# EAGLE board hometech++ (EAGLE 5.11)
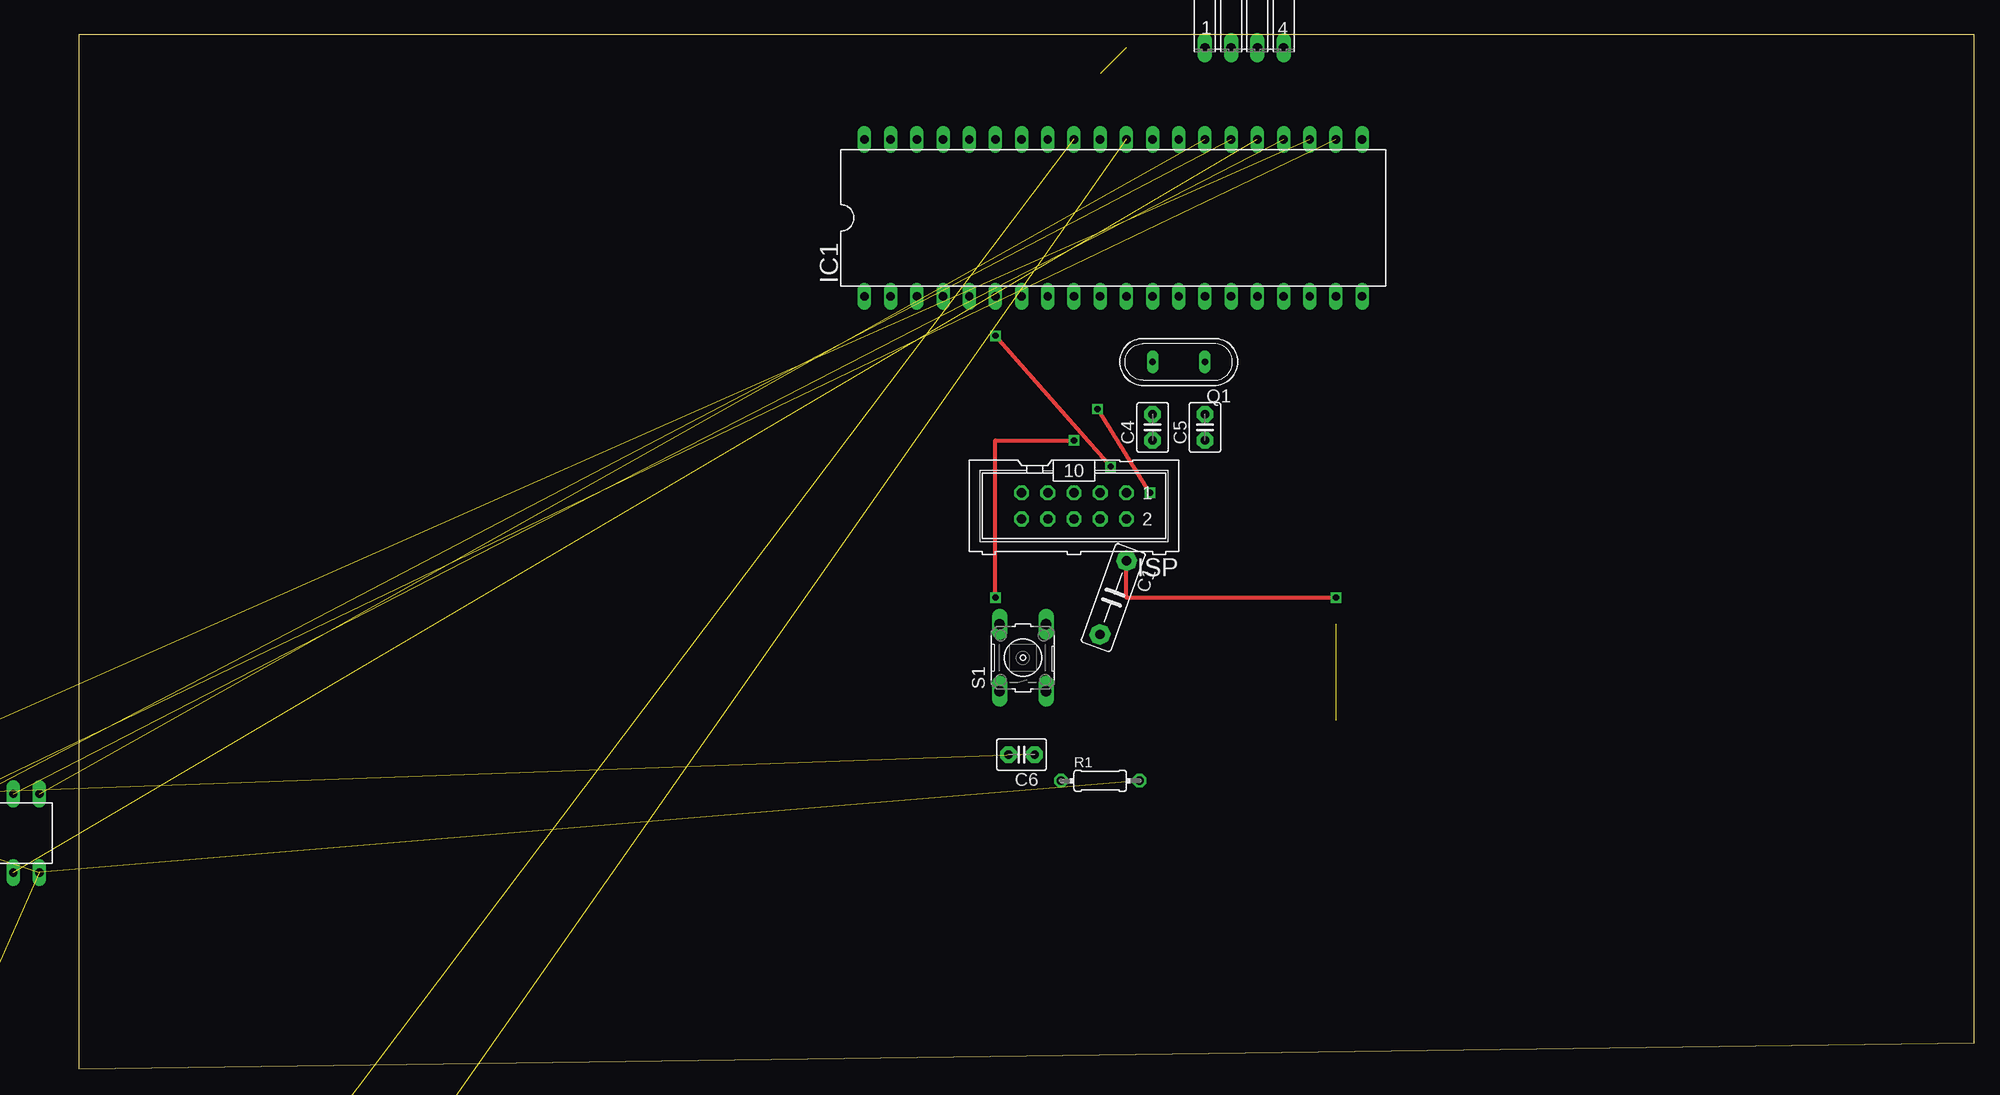
[diagram p0: board, top side]
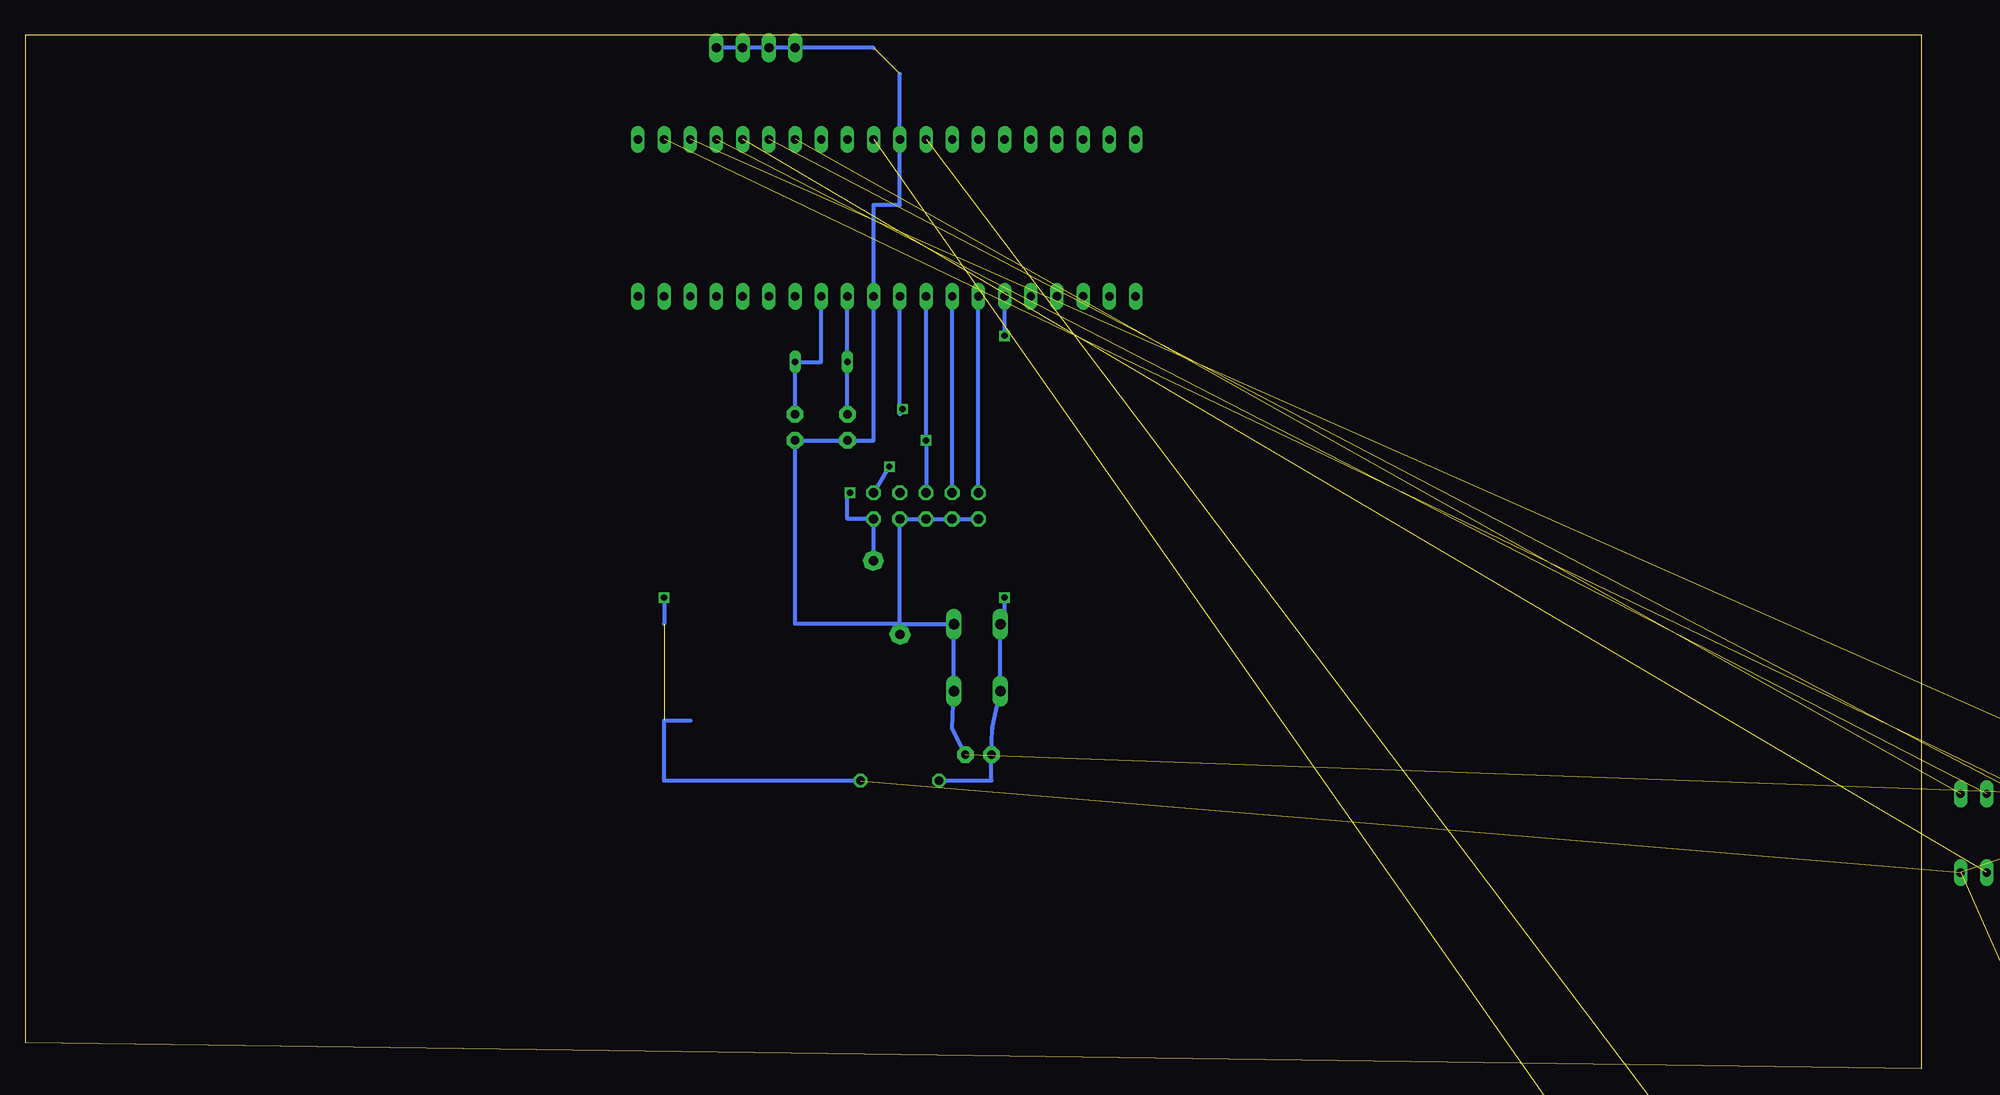
[diagram p1: board, bottom side, seen from below]

Size 183.82 x 100.32 mm. Coordinates in mm from the lower left corner, seen from the top.
Outline: 0,0 183.82,2.54 183.82,100.32 0,100.32 0,0
Copper layers (1*16): Top 0.035mm / dielectric 1.5mm / Bottom 0.035mm
Design rules "default *": minimum track width 10mil, minimum drill 1mil, track to track 8mil, track to pad 8mil, pad to pad 8mil, via to via 8mil, smd to smd 8mil, copper to edge 8mil, drill to drill 8mil, minimum pad ring 10mil, minimum via ring 8mil, stop-mask expansion 0mil, vias tented up to drill 0mil, thermal gap 10mil

## Footprints (pad centres in the part's own frame; a part is rotated, then mirrored left to right if it is on the bottom)
C7.5B3 = drill 0.914 pad 1.905 octagon: 1 -3.81,0; 2 3.81,0
C2.5-3 = drill 0.813 pad 1.6 octagon: 1 -1.27,0; 2 1.27,0
DO41-10 = drill 1.118 round: A 5.08,0; C -5.08,0
DIL40 = drill 0.813 long: 1 -24.13,-7.62; 2 -21.59,-7.62; 3 -19.05,-7.62; 4 -16.51,-7.62; 5 -13.97,-7.62; 6 -11.43,-7.62; 7 -8.89,-7.62; 8 -6.35,-7.62; 9 -3.81,-7.62; 10 -1.27,-7.62; 11 1.27,-7.62; 12 3.81,-7.62; 13 6.35,-7.62; 14 8.89,-7.62; 15 11.43,-7.62; 16 13.97,-7.62; 17 16.51,-7.62; 18 19.05,-7.62; 19 21.59,-7.62; 20 24.13,-7.62; 21 24.13,7.62; 22 21.59,7.62; 23 19.05,7.62; 24 16.51,7.62; 25 13.97,7.62; 26 11.43,7.62; 27 8.89,7.62; 28 6.35,7.62; 29 3.81,7.62; 30 1.27,7.62; 31 -1.27,7.62; 32 -3.81,7.62; 33 -6.35,7.62; 34 -8.89,7.62; 35 -11.43,7.62; 36 -13.97,7.62; 37 -16.51,7.62; 38 -19.05,7.62; 39 -21.59,7.62; 40 -24.13,7.62
DIL20 = drill 0.813 long: 1 -11.43,-3.81; 2 -8.89,-3.81; 3 -6.35,-3.81; 4 -3.81,-3.81; 5 -1.27,-3.81; 6 1.27,-3.81; 7 3.81,-3.81; 8 6.35,-3.81; 9 8.89,-3.81; 10 11.43,-3.81; 11 11.43,3.81; 12 8.89,3.81; 13 6.35,3.81; 14 3.81,3.81; 15 1.27,3.81; 16 -1.27,3.81; 17 -3.81,3.81; 18 -6.35,3.81; 19 -8.89,3.81; 20 -11.43,3.81
ML10 = drill 0.914 octagon: 1 -5.08,-1.27; 2 -5.08,1.27; 3 -2.54,-1.27; 4 -2.54,1.27; 5 0,-1.27; 6 0,1.27; 7 2.54,-1.27; 8 2.54,1.27; 9 5.08,-1.27; 10 5.08,1.27
QS = drill 0.61 long: 1 -2.54,0; 2 2.54,0
0204/7 = drill 0.813 octagon: 1 -3.81,0; 2 3.81,0
AC01 = drill 1.1 pad 2 round: 1 -8.9,0; 2 8.9,0
0204V = drill 0.813 octagon: 1 -1.27,0; 2 1.27,0
B3F-10XX = drill 1.016 long: 1 -3.251,2.261; 2 3.251,2.261; 3 -3.251,-2.261; 4 3.251,-2.261
04PA = drill 0.914 long: 1 -3.81,0; 2 -1.27,0; 3 1.27,0; 4 3.81,0

## Placement (x,y rotation side)
C1  10u  [C7.5B3]  100.33,45.72 250.1 top
C2  [C2.5-3]  -35.56,-93.98 0 top  (outside the outline)
C3  [C2.5-3]  -43.18,-96.52 0 top  (outside the outline)
C4  27pf  [C2.5-3]  104.14,62.23 90 top
C5  27pf  [C2.5-3]  109.22,62.23 90 top
C6  100nf  [C2.5-3]  91.44,30.48 180 top
D1  1N4004  [DO41-10]  -22.86,-35.56 0 top  (outside the outline)
D2  1N4004  [DO41-10]  -22.86,-43.18 0 top  (outside the outline)
D3  1N4004  [DO41-10]  -22.86,-50.8 0 top  (outside the outline)
D4  1N4004  [DO41-10]  -22.86,-58.42 0 top  (outside the outline)
D5  1N4004  [DO41-10]  -22.86,-66.04 0 top  (outside the outline)
D6  1N4004  [DO41-10]  -22.86,-73.66 0 top  (outside the outline)
D7  1N4004  [DO41-10]  -22.86,-81.28 0 top  (outside the outline)
D8  1N4004  [DO41-10]  -22.86,-88.9 0 top  (outside the outline)
IC1  ATMEGA644-20PU  [DIL40]  100.33,82.55 0 top
IC2  L293E  [DIL20]  -15.24,22.86 0 top  (outside the outline)
ISP  [ML10]  96.52,54.61 180 top
Q1  16MHz  [QS]  106.68,68.58 180 top
R1  10K  [0204/7]  99.06,27.94 0 top
R2  [AC01]  -20.32,-5.08 0 top  (outside the outline)
R3  [AC01]  -20.32,-12.7 0 top  (outside the outline)
R4  [AC01]  -20.32,-20.32 0 top  (outside the outline)
R5  [AC01]  -20.32,-27.94 0 top  (outside the outline)
R6  [0204V]  -27.94,-96.52 0 top  (outside the outline)
S1  [B3F-10XX]  91.57,39.88 90 top
SL1  [04PA]  113.03,99.06 0 top

## Library data of the parts
C1-C6 = capacitor-wima
D1-D8 = diode
IC1 = atmel
IC2 = l293e
ISP = con-harting-ml
Q1 = special
R1 R6 = resistor
R2-R5 = resistor-power; OC_FARNELL: unknown; OC_NEWARK: unknown
S1 = switch-omron
SL1 = con-amp-quick

## Nets
GND: C1.2 C2.2 C3.2 C4.1 C5.1 C6.1 D5.A D6.A D7.A D8.A IC1.11 IC1.31 IC2.5 IC2.6 IC2.15 IC2.16 ISP.4 ISP.6 ISP.8 ISP.10 R2.2 R3.2 R4.2 R5.2 S1.3 S1.4 SL1.1 SL1.2 SL1.3 SL1.4
N$1: IC1.23 IC2.19
N$2: IC1.24 IC2.12
N$3: IC1.22 IC2.1
N$4: IC1.25 IC2.9
N$5: IC1.6 ISP.1
N$6: C6.2 IC1.9 ISP.5 R1.1 S1.1 S1.2
N$7: IC1.7 ISP.9
N$8: IC1.27 IC2.11
N$9: C4.2 IC1.12 Q1.2
N$10: C5.2 IC1.13 Q1.1
N$11: IC1.26 IC2.2
N$12: IC2.4 R2.1
N$13: IC2.7 R3.1
N$14: IC2.14 R4.1
N$15: IC2.17 R5.1
N$17: C2.1 IC1.30 R6.1
N$18: IC1.8 ISP.7
N$19: D1.A D5.C IC2.3
N$20: D2.A D6.C IC2.8
N$21: D3.A D7.C IC2.13
N$22: D4.A D8.C IC2.18
N$23: C3.1 IC1.32
VCC: C1.1 D1.C D2.C D3.C D4.C IC1.10 IC2.10 IC2.20 ISP.2 R1.2 R6.2

## Tracks (layer width: path | path; a pad name or v marks a point on that pad's centre or on a via)
GND  (15 unrouted)
  Bottom 0.406: C6.1 93.98,33.05 S1.3 S1.4 99.06,43.13 99.06,43.18 | ISP.10 ISP.8 ISP.6 ISP.4 99.06,43.18 | 99.06,43.18 109.22,43.18 C5.1 C4.1 101.6,60.96 IC1.11 101.6,83.82 99.06,83.82 IC1.31 99.06,96.52 | 99.06,43.18 C1.2 | 101.6,99.06 SL1.1 SL1.2 SL1.3 SL1.4
N$1  (1 unrouted)
N$2  (1 unrouted)
N$3  (1 unrouted)
N$4  (1 unrouted)
N$5  (via drill 0.6)
  Top 0.406: v100.08,58.42 v88.9,71.12
  Bottom 0.406: v88.9,71.12 IC1.6 | ISP.1 v100.08,58.42
N$6  (via drill 0.6)
  Top 0.406: v88.9,45.72 88.9,60.96 v96.52,60.96
  Bottom 0.406: R1.1 90.17,27.94 C6.2 90.09,33.02 S1.1 S1.2 88.9,43.13 v88.9,45.72 | ISP.5 v96.52,60.96 IC1.9
N$7
  Bottom 0.406: ISP.9 IC1.7
N$8  (1 unrouted)
N$9
  Bottom 0.406: C4.2 Q1.2 IC1.12
N$10
  Bottom 0.406: C5.2 Q1.1 106.68,68.58 IC1.13
N$11  (1 unrouted)
N$12  (1 unrouted)
N$13  (1 unrouted)
N$14  (1 unrouted)
N$15  (1 unrouted)
N$17  (2 unrouted)
N$18
  Bottom 0.406: ISP.7 IC1.8
N$19  (2 unrouted)
N$20  (2 unrouted)
N$21  (2 unrouted)
N$22  (2 unrouted)
N$23  (1 unrouted)
VCC  (via drill 0.6)  (8 unrouted)
  Top 0.406: C1.1 101.6,49.3 101.6,45.72 v121.92,45.72 | v103.89,55.88 v98.81,64.01
  Bottom 0.406: v121.92,45.72 121.92,43.18 | C1.1 101.6,49.3 ISP.2 104.14,53.34 104.14,55.88 v103.89,55.88 | 99.06,64.01 99.06,63.5 | v98.81,64.01 99.06,64.01 | 99.06,64.01 IC1.10 | R1.2 121.92,27.94 121.92,33.78 119.38,33.78